# EAGLE board CT_schematic (EAGLE 7.6.0)

Size 100 x 80 mm. Coordinates in mm from the lower left corner, seen from the top.
Outline: 0,0 100,0 100,80 0,80 0,0
Copper layers (1*16): Top 0.035mm / dielectric 1.5mm / Bottom 0.035mm
Design rules "default": minimum track width 10mil, minimum drill 24mil, track to track 8mil, track to pad 8mil, pad to pad 8mil, via to via 8mil, smd to smd 8mil, copper to edge 40mil, drill to drill 8mil, minimum pad ring 10mil, minimum via ring 8mil, stop-mask expansion 4mil, vias tented up to drill 0mil, thermal gap 10mil

## Footprints (pad centres in the part's own frame; a part is rotated, then mirrored left to right if it is on the bottom)
C0603 = smd 0.8 x 0.8: 1 -0.762,0; 2 0.762,0
C0402 = smd 0.5 x 0.5: 1 -0.508,0; 2 0.508,0
C1206 = smd 1.3 x 1.6: 1 -1.524,0; 2 1.524,0
C1210 = smd 1.2 x 2.5: 1 -1.524,0; 2 1.524,0
EXV-9H = smd 3.505 x 1.676: 1 -2.857,0; 2 2.857,0
L0603 = smd 0.8 x 0.8: 1 -0.762,0; 2 0.762,0
PJ-037B_PACKAGE = drill 3.7 square: 1 12,0 | drill 3.2 square: 2 6,0
R0603 = smd 0.8 x 0.8: 1 -0.762,0; 2 0.762,0
UFQFPN28 = smd 0.559 x 0.305: 1 -2.07,1.5; 7 -2.07,-1.5; 15 2.07,-1.5; 21 2.07,1.5 | smd 0.813 x 0.305: 2 -1.943,1; 3 -1.943,0.5; 4 -1.943,0; 5 -1.943,-0.5; 6 -1.943,-1; 16 1.943,-1; 17 1.943,-0.5; 18 1.943,0; 19 1.943,0.5; 20 1.943,1 | smd 0.305 x 0.559: 8 -1.5,-2.07; 14 1.5,-2.07; 22 1.5,2.07; 28 -1.5,2.07 | smd 0.305 x 0.813: 9 -1,-1.943; 10 -0.5,-1.943; 11 0,-1.943; 12 0.5,-1.943; 13 1,-1.943; 23 1,1.943; 24 0.5,1.943; 25 0,1.943; 26 -0.5,1.943; 27 -1,1.943
SAMTEC_FTSH-105-01-L-DV-K = smd 0.762 x 2.794: 1 -2.54,-2.032; 2 -2.54,2.032; 3 -1.27,-2.032; 4 -1.27,2.032; 5 0,-2.032; 6 0,2.032; 7 1.27,-2.032; 8 1.27,2.032; 9 2.54,-2.032; 10 2.54,2.032
SOIC-8 = smd 1.6 x 0.6: 1 -2.7,1.905 | smd 1.55 x 0.6: 2 -2.7,0.635; 3 -2.7,-0.635; 4 -2.7,-1.905; 5 2.7,-1.905; 6 2.7,-0.635; 7 2.7,0.635; 8 2.7,1.905
182-009-MALE = drill 1.194 pad 1.524 octagon: 1 -5.537,10.923; 2 -2.769,10.923; 3 0,10.923; 4 2.769,10.923; 5 5.537,10.923; 6 -4.153,8.08; 7 -1.384,8.08; 8 1.384,8.08; 9 4.153,8.08 | hole 3.048: -12.446,9.501; 12.446,9.501
ASFL1 = smd 1.7 x 1.5: 1 -1.27,-1.1; 2 1.27,-1.1; 3 1.27,1.1; 4 -1.27,1.1
WSON-8 = smd 0.3 x 0.6: 1 -0.75,0; 2 0.05,0; 3 0.85,0; 4 1.65,0; 5 1.65,3.8; 6 0.85,3.8; 7 0.05,3.8; 8 -0.75,3.8 | smd 3 x 2.6: PAD 0.45,1.9
SON-6 = smd 0.55 x 0.3: 1 -0.355,0.5 | smd 0.52 x 0.3: 2 -0.37,0; 3 -0.37,-0.5; 4 0.37,-0.5; 5 0.37,0; 6 0.37,0.5
SW_4-1437565-2 = smd 1.4 x 2.1: 1 -2.23,4.55; 2 -2.23,-4.55; 3 2.23,4.55; 4 2.23,-4.55
LGM67K-G1J2-24-Z = smd 0.8 x 1.4: A -2,0; C 0,0
NC7SZ125M5X = smd 1.3 x 0.7: 1 -1.3,0.95; 2 -1.3,0; 3 -1.3,-0.95; 4 1.3,-0.95; 5 1.3,0.95

## Placement (x,y rotation side)
C1  1e-07  [C0603]  -52.07,66.04 0 top  (outside the outline)
C2  1e-07  [C0603]  -55.88,66.04 0 top  (outside the outline)
C3  4.7e-06  [C0603]  -44.45,66.04 0 top  (outside the outline)
C4  1e-07  [C0603]  -59.69,66.04 0 top  (outside the outline)
C5  4.7e-06  [C0603]  -48.26,66.04 0 top  (outside the outline)
C6  1e-08  [C0603]  -63.5,66.04 0 top  (outside the outline)
C7  1e-08  [C0603]  -67.31,66.04 0 top  (outside the outline)
C8  1e-06  [C0603]  -15.24,71.12 0 top  (outside the outline)
C9  1e-07  [C0402]  -53.34,71.12 0 top  (outside the outline)
C10  1e-07  [C0402]  -57.15,71.12 0 top  (outside the outline)
C11  1e-08  [C0402]  -60.96,71.12 0 top  (outside the outline)
C12  1e-08  [C0402]  -64.77,71.12 0 top  (outside the outline)
C13  1e-05  [C1206]  -31.75,60.96 0 top  (outside the outline)
C14  1e-05  [C1210]  -68.58,52.07 0 top  (outside the outline)
C15  1e-07  [C0402]  -68.58,71.12 0 top  (outside the outline)
C16  0.0001  [EXV-9H]  -35.56,53.34 0 top  (outside the outline)
C17  0.0001  [EXV-9H]  -46.99,53.34 0 top  (outside the outline)
C18  1e-08  [C0402]  -15.24,76.2 0 top  (outside the outline)
C19  1e-08  [C0402]  -19.05,76.2 0 top  (outside the outline)
F1  240.0  [L0603]  -19.05,71.12 0 top  (outside the outline)
J1  PJ-037B  [PJ-037B_PACKAGE]  -57.15,29.21 0 top  (outside the outline)
R1  10000.0  [R0603]  -15.24,66.04 0 top  (outside the outline)
R2  1000.0  [R0603]  -22.86,71.12 0 top  (outside the outline)
R3  1600.5  [R0603]  -26.67,71.12 0 top  (outside the outline)
R4  4700.0  [R0603]  -30.48,71.12 0 top  (outside the outline)
R5  10000.0  [R0603]  -20.32,66.04 0 top  (outside the outline)
R6  10000.0  [R0603]  -25.4,66.04 0 top  (outside the outline)
R7  10000.0  [R0603]  -30.48,66.04 0 top  (outside the outline)
R8  5.0  [R0603]  -34.29,71.12 0 top  (outside the outline)
R9  120.0  [R0603]  -38.1,71.12 0 top  (outside the outline)
R10  100000.0  [R0603]  -49.53,59.69 0 top  (outside the outline)
R11  100000.0  [R0603]  -54.61,59.69 0 top  (outside the outline)
R12  2231.0  [R0603]  -41.91,71.12 0 top  (outside the outline)
R13  1000.0  [R0603]  -45.72,71.12 0 top  (outside the outline)
R14  10000.0  [R0603]  -35.56,66.04 0 top  (outside the outline)
R15  10000.0  [R0603]  -40.64,66.04 0 top  (outside the outline)
R16  9100.0  [R0603]  -49.53,71.12 0 top  (outside the outline)
R17  680000.0  [R0603]  -59.69,59.69 0 top  (outside the outline)
R18  120000.0  [R0603]  -64.77,59.69 0 top  (outside the outline)
U1  stm32f042g4u7  [UFQFPN28]  -24.13,60.96 0 top  (outside the outline)
U2  FTSH-105-01-L-DV-K  [SAMTEC_FTSH-105-01-L-DV-K]  -35.56,30.48 0 top  (outside the outline)
U3  SN65HVD230D  [SOIC-8]  -41.91,41.91 0 top  (outside the outline)
U4  182-009-113R531  [182-009-MALE]  -36.83,6.35 0 top  (outside the outline)
U5  ASFL1-25MHZ-NCS  [ASFL1]  -26.67,53.34 0 top  (outside the outline)
U6  LP3878SDX-ADJ/NOPB  [WSON-8]  -63.5,40.64 0 top  (outside the outline)
U7  TPS3895ADRYR  [SON-6]  -21.59,74.93 0 top  (outside the outline)
U8  4-1437565-2  [SW_4-1437565-2]  -27.94,43.18 0 top  (outside the outline)
U9  Q65110A2395  [LGM67K-G1J2-24-Z]  -57.15,52.07 0 top  (outside the outline)
U10  nc7sz125m5x  [NC7SZ125M5X]  -36.83,59.69 0 top  (outside the outline)
U11  nc7sz125m5x  [NC7SZ125M5X]  -43.18,59.69 0 top  (outside the outline)

## Library data of the parts
C1-C19 F1 J1 R1-R18 U1-U11 = circuit_tree

## Nets
CLK_U1_2: U1.2 U5.3
GND: C1.2 C2.2 C3.2 C4.2 C5.2 C6.2 C7.2 C8.2 C9.2 C10.2 C11.2 C12.2 C13.2 C14.2 C15.2 C16.2 C17.2 C18.2 C19.2 J1.2 R2.2 R8.2 R10.2 R13.2 R16.2 R18.2 U1.16 U2.3 U2.5 U3.2 U4.5 U5.2 U6.3 U6.PAD U7.2 U9.C U10.2 U10.3 U11.1 U11.3
NET_U1_4: R4.1 U1.4 U11.4
NET_U1_5: C6.1 C7.1 C8.1 F1.1 U1.5
NET_U1_27: R3.1 U1.27 U9.A
NET_U1_28: R1.1 U1.28 U8.3 U8.4
NET_U2_9: R8.1 U2.9
NET_U3_6: R9.2 U3.6
NET_U3_8: R10.1 U3.8
NET_U4_2: R9.2 U3.6 U4.2
NET_U4_3: R9.1 U3.7 U4.3
NET_U6_1: C12.1 U6.1
NET_U6_6: R12.2 R13.1 U6.6
NET_U6_8: R11.1 U6.8
NET_U7_1: R15.1 R16.1 U7.1
NET_U7_3: R17.2 R18.1 U7.3
NET_U7_4: R14.1 U7.4 U10.4 U11.2
NET_U8_1: R2.1 U8.1 U8.2
PROC_CAN_RX: U1.1 U3.4
PROC_SYS_SWCLK: R6.1 U1.22 U2.4
PROC_SYS_SWDIO: R7.1 U1.21 U2.2
RST_OUT_U2_JTAG_RST_B: R5.1 U2.10 U10.1
VCC_S1_11V1: C13.1 C16.1 C17.1 J1.1 R11.2 U6.4
VCC_TIER1_3V3: C1.1 C2.1 C3.1 C4.1 C5.1 C9.1 C10.1 C11.1 C14.1 C15.1 C18.1 C19.1 F1.2 R1.2 R3.2 R4.2 R5.2 R6.2 R7.2 R12.1 R14.2 R15.2 R17.1 U1.17 U1.18 U2.1 U3.3 U5.4 U6.5 U7.6 U10.5 U11.5

## Tracks (layer width: path | path; a pad name or v marks a point on that pad's centre or on a via)
CLK_U1_2  (1 unrouted)
GND  (39 unrouted)
NET_U1_4  (2 unrouted)
NET_U1_5  (4 unrouted)
NET_U1_27  (2 unrouted)
NET_U1_28  (3 unrouted)
NET_U2_9  (1 unrouted)
NET_U3_6  (1 unrouted)
NET_U3_8  (1 unrouted)
NET_U4_2  (2 unrouted)
NET_U4_3  (2 unrouted)
NET_U6_1  (1 unrouted)
NET_U6_6  (2 unrouted)
NET_U6_8  (1 unrouted)
NET_U7_1  (2 unrouted)
NET_U7_3  (2 unrouted)
NET_U7_4  (3 unrouted)
NET_U8_1  (2 unrouted)
PROC_CAN_RX  (1 unrouted)
PROC_SYS_SWCLK  (2 unrouted)
PROC_SYS_SWDIO  (2 unrouted)
RST_OUT_U2_JTAG_RST_B  (2 unrouted)
VCC_S1_11V1  (5 unrouted)
VCC_TIER1_3V3  (31 unrouted)